# EAGLE board attiny_rc_switch_th_board (EAGLE 9.7.0)
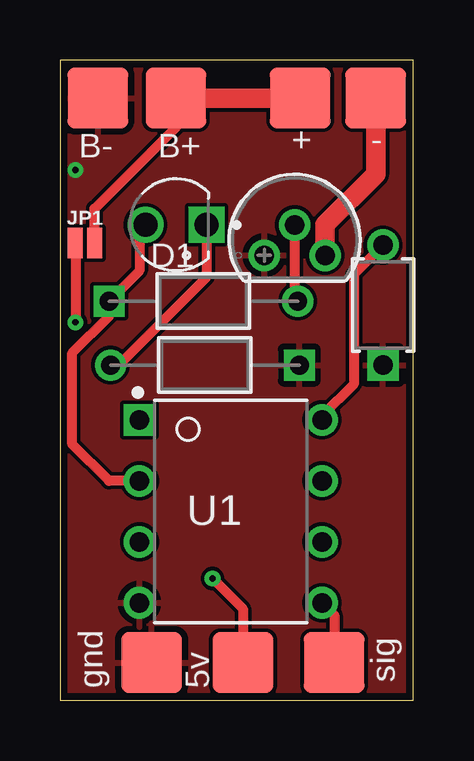
[diagram p0: board, top side]
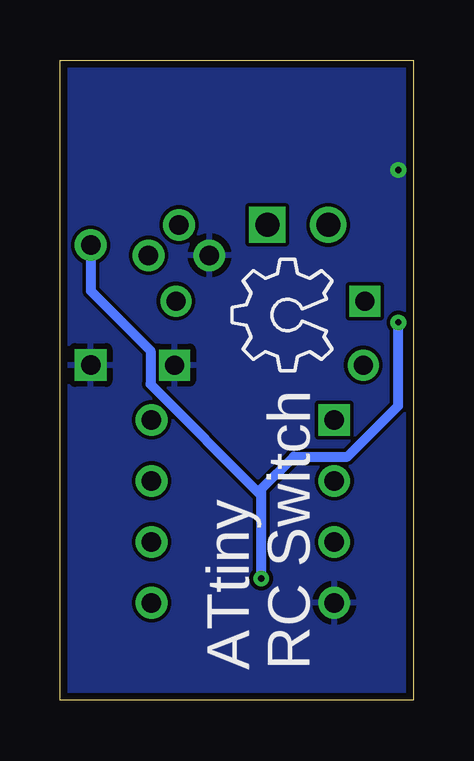
[diagram p1: board, bottom side, seen from below]

Size 14.73 x 26.67 mm. Coordinates in mm from the lower left corner, seen from the top.
Outline: 0,0 14.73,0 14.73,26.67 0,26.67 0,0
Copper layers (1*16): Top 0.035mm / dielectric 1.5mm / Bottom 0.035mm
Design rules "Fusion Electronics Design Rules *": minimum track width 6mil, minimum drill 10mil, track to track 6mil, track to pad 6mil, pad to pad 6mil, via to via 6mil, smd to smd 6mil, copper to edge 12mil, drill to drill 6mil, minimum pad ring 10mil, minimum via ring 8mil, stop-mask expansion 4mil, vias tented up to drill 0mil, thermal gap 10mil

## Footprints (pad centres in the part's own frame; a part is rotated, then mirrored left to right if it is on the bottom)
K10XK10X7RF5UH5 = drill 0.813 pad 1.321 square: 1 0,0 | drill 0.813 pad 1.321: 2 5,0
OSR5JA3Z74A = drill 1 pad 1.5: A 1.27,0 | drill 1 pad 1.5 square: C -1.27,0
SMT-JUMPER_2_NO_NO-SILK = smd 0.635 x 1.27: 1 -0.406,0; 2 0.406,0
RESISTOR_1/8W_CF18JT = drill 0.787 pad 1.295 square: 1 0,0 | drill 0.787 pad 1.295: 2 7.874,0
ATTINY85-20PU = drill 0.813 square: 1 -3.81,3.81 | drill 0.813: 2 -3.81,1.27; 3 -3.81,-1.27; 4 -3.81,-3.81; 5 3.81,-3.81; 6 3.81,-1.27; 7 3.81,1.27; 8 3.81,3.81
MOSFET_N-CH_VN3205N3-G = drill 0.813 pad 1.321: 1 0,0; 2 1.27,1.27; 3 2.54,0
SMD_PAD_NO_STENCIL = smd 2.54 x 2.54: P$1 0,0

## Placement (x,y rotation side)
C1  0.1uF  [K10XK10X7RF5UH5]  13.46,13.97 90 top
D1  LED_3MM_OSR5JA3Z74A  [OSR5JA3Z74A]  4.83,19.81 180 top
JP1  JUMPER-SMT_2_NO_NO-SILK  [SMT-JUMPER_2_NO_NO-SILK]  1.03,19.05 0 top
R1  RESISTOR_1/8W_CF18JTSTA_CF18_STP  [RESISTOR_1/8W_CF18JT]  2.03,16.64 0 top
R2  RESISTOR_1/8W_CF18JTSTA_CF18_STP  [RESISTOR_1/8W_CF18JT]  9.97,13.97 180 top
U1  ATTINY85-20PU  [ATTINY85-20PU]  7.11,7.87 0 top
U2  MOSFET_N-CH_VN3205N3-GTO-92_MC_MCH  [MOSFET_N-CH_VN3205N3-G]  8.51,18.54 0 top
U$1  SMD_PAD_NO_STENCIL  [SMD_PAD_NO_STENCIL]  7.62,1.57 0 top
U$2  SMD_PAD_NO_STENCIL  [SMD_PAD_NO_STENCIL]  3.81,1.57 0 top
U$3  SMD_PAD_NO_STENCIL  [SMD_PAD_NO_STENCIL]  13.16,25.1 0 top
U$4  SMD_PAD_NO_STENCIL  [SMD_PAD_NO_STENCIL]  10.01,25.1 0 top
U$5  SMD_PAD_NO_STENCIL  [SMD_PAD_NO_STENCIL]  4.83,25.1 0 top
U$6  SMD_PAD_NO_STENCIL  [SMD_PAD_NO_STENCIL]  1.57,25.1 0 top
U$7  SMD_PAD_NO_STENCIL  [SMD_PAD_NO_STENCIL]  11.43,1.57 0 top

## Library data of the parts
C1 = scotts-library; COPYRIGHT: Copyright (C) 2024 Ultra Librarian. All rights reserved.; MANUFACTURER_PART_NUMBER: K103K10X7RF5UH5; MFR_NAME: Vishay; TYPE: Ceramic Capacitor
D1 = scotts-library; AVAILABILITY: In Stock; CHECK_PRICES: https://www.snapeda.com/parts/OSR5JA3Z74A/OptoSupply/view-part/?ref=eda; DESCRIPTION: LED; 3mm; red; 220÷330mcd; 70°; Front: convex; Pitch: 2.54mm; MF: optosupply; MP: OSR5JA3Z74A; PACKAGE: None; PRICE: None; SNAPEDA_LINK: https://www.snapeda.com/parts/OSR5JA3Z74A/OptoSupply/view-part/?ref=snap
JP1 = SparkFun-Jumpers
R1 R2 = scotts-library; COPYRIGHT: Copyright (C) 2025 Ultra Librarian. All rights reserved.; MANUFACTURER_PART_NUMBER: CF18JT100K; MFR_NAME: Stackpole International
U1 = scotts-library; MANUFACTURER: Atmel
U2 = scotts-library; COPYRIGHT: Copyright (C) 2025 Ultra Librarian. All rights reserved.; MANUFACTURER_PART_NUMBER: VN3205N3-G; MFR_NAME: Microchip
U$1-U$7 = scotts-library

## Nets
5V: C1.2 JP1.1 U1.8 U$1.P$1
GND: C1.1 R2.1 U1.4 U2.1 U$2.P$1 U$6.P$1
N$2: R1.2 U2.2
N$3: D1.C R2.2
OUT+: JP1.2 U$4.P$1 U$5.P$1
OUT-: U2.3 U$3.P$1
PB1: U1.6
PB2: U1.7
PB3: D1.A R1.1 U1.2
PB4: U1.3
PB5: U1.1
SIG: U1.5 U$7.P$1

## Tracks (layer width: path | path; a pad name or v marks a point on that pad's centre or on a via)
5V  (via drill 0.25 pad 0.61)
  Top 0.406: v0.64,15.75 0.64,18.53 0.62,18.54 JP1.1 | C1.2 12.24,17.75 12.24,13.18 10.92,11.85 U1.8 | v6.35,5.08 7.62,3.81 U$1.P$1
  Bottom 0.406: 6.35,8.55 6.35,8.8 4.99,10.16 2.75,10.16 0.64,12.27 v0.64,15.75 | 6.35,8.55 v6.35,5.08 | C1.2 13.46,17.06 10.97,14.57 10.97,13.18 6.35,8.55
GND  (via drill 0.25)
  other vias: 0.64,22.1
  pour Top: 0.08,0.08 15.16,0.08 15.16,26.59 0.08,26.59
  pour Bottom: 0.08,0.08 15.16,0.08 15.16,26.59 0.08,26.59
N$2
  Top 0.406: U2.2 9.78,16.76 R1.2
N$3
  Top 0.406: R2.2 2.43,13.97 6.1,17.63 D1.C
OUT+
  Top 0.406: JP1.2 1.44,20.48 4.83,23.88 U$5.P$1
  Top 0.813: U$5.P$1 U$4.P$1
OUT-
  Top 0.813: U2.3 11.05,19.81 13.16,21.92 U$3.P$1
PB3
  Top 0.406: D1.A 3.56,19.43 3.3,19.18 3.3,17.91 R1.1 2.03,16 0.51,14.48 0.51,10.67 2.03,9.14 U1.2
SIG
  Top 0.406: U1.5 11.43,3.56 U$7.P$1

## Text on the board
tPlace: B- | B+ | + | - | gnd | 5v | sig
bPlace: RC Switch | ATtiny